# Altium PCB 4bit_decoder.PcbDoc
Units mm, origin at the board's own origin, x right, y up, seen from the top; angles counter-clockwise.
Board outline 158.85 x 44.7 mm, 2 copper layers (Top Layer, Bottom Layer); 30 components, 64 nets, 302 pads, 163 vias.
Unrouted connection lines stored in the file: 17.
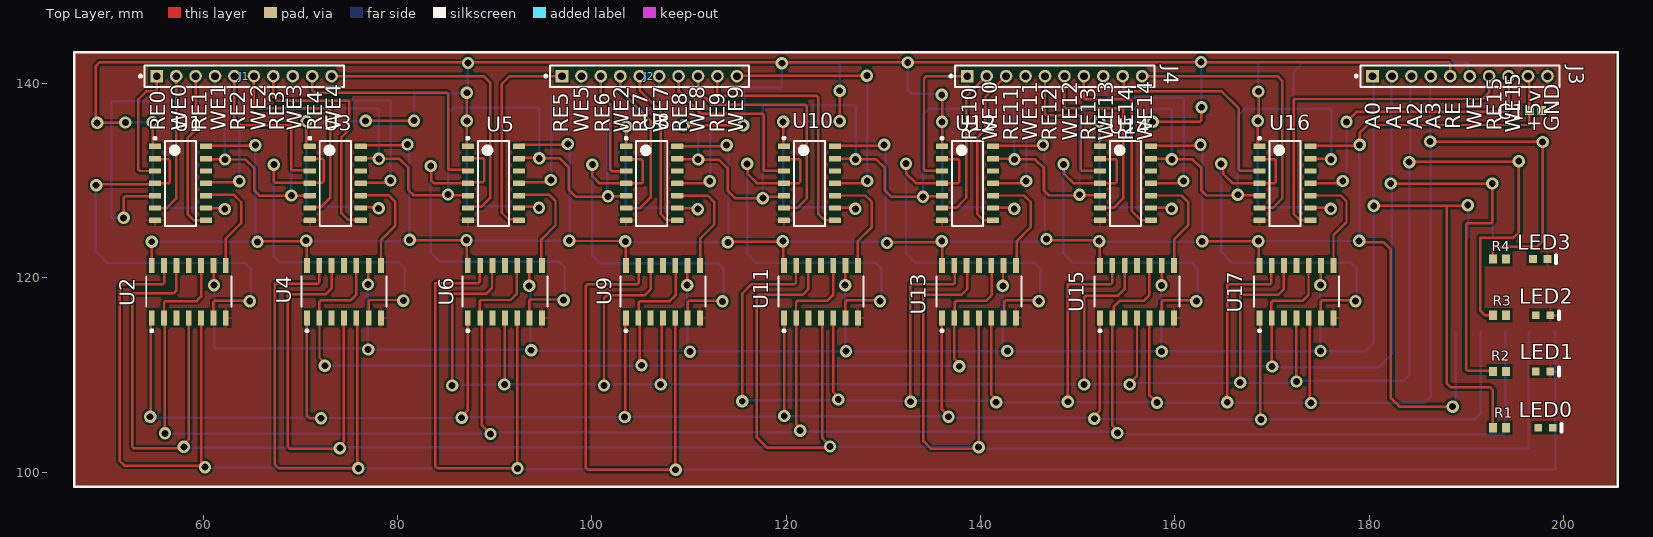
[diagram p0: Top Layer view]
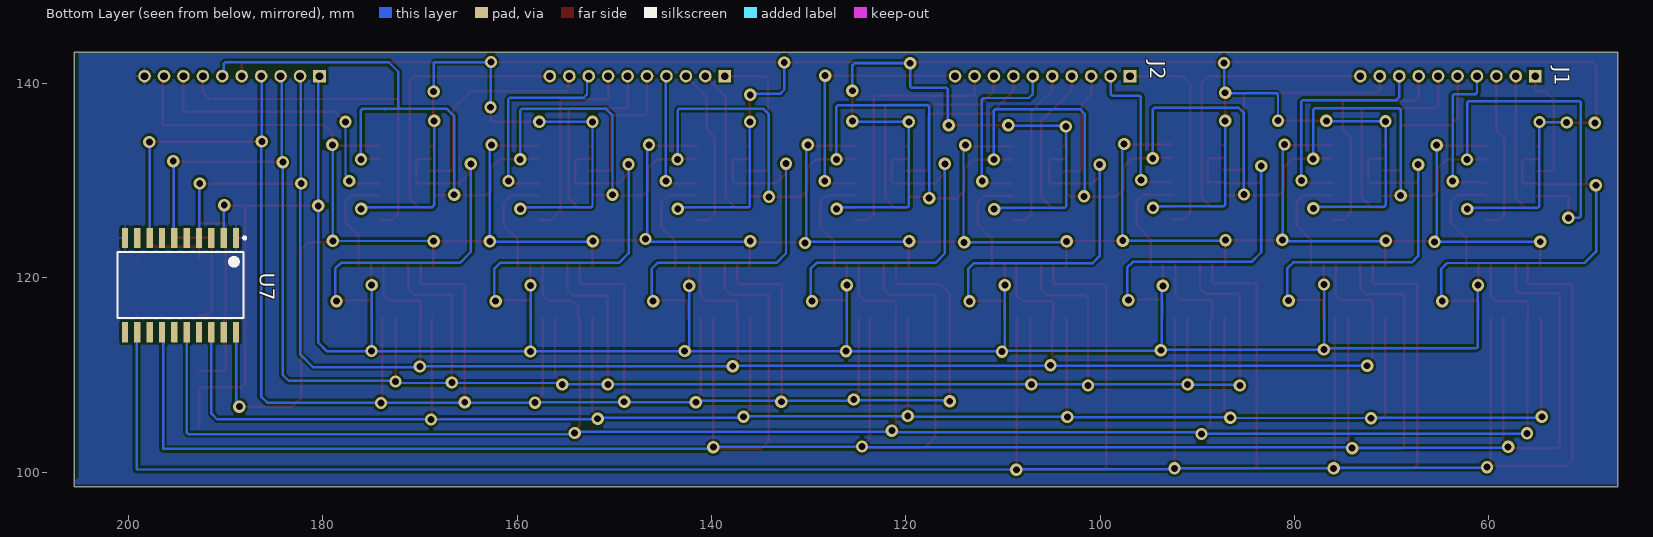
[diagram p1: Bottom Layer view, seen from below]
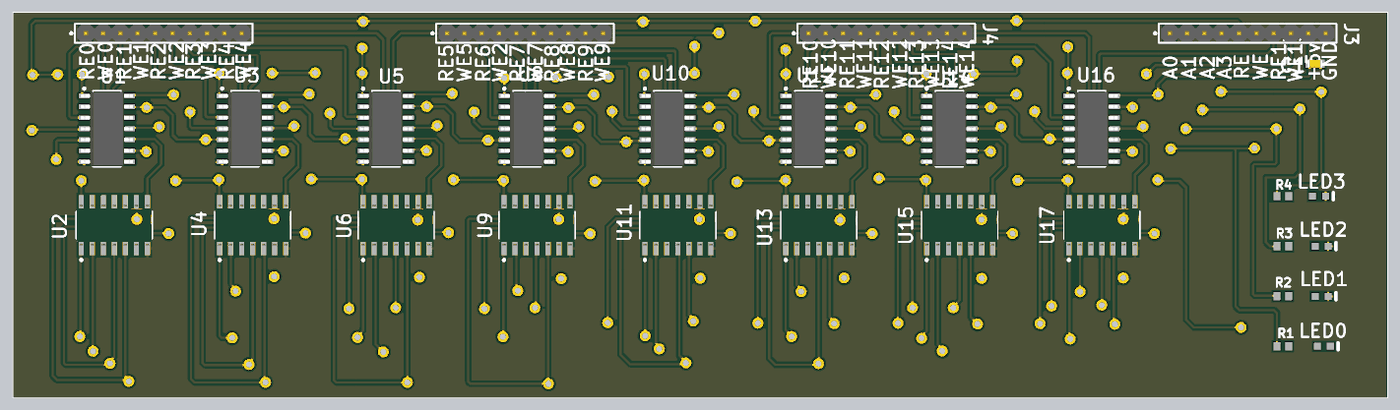
[diagram p2: 3D render of the assembled board from above, using the file's embedded part models]

## Layer stack, top to bottom
Top Solder: solder mask 0.0102, Solder Resist, Dk 3.5
Top Layer: signal copper 0.0356
Dielectric 1: dielectric 0.32, FR-4, Dk 4.8
Bottom Layer: signal copper 0.0356
Bottom Solder: solder mask 0.0102, Solder Resist, Dk 3.5

## Board outline
46.725,98.525 46.725,143.225 205.575,143.225 205.575,98.525

## Design rules (kind name [scope] priority, off if disabled: settings)
Clearance [All] p1: gap=0.254 ignorepadtopadclearanceinfootprint=FALSE
PolygonConnect [All] p1: connectstyle=Relief reliefconductorwidth=0.254 reliefentries=4 polygonreliefangle="90 Angle" airgapwidth=0.254
RoutingVias [All] p1: holewidth=0.711 width=1.27 viastyle="Through Hole" minholewidth=0.711 minwidth=1.27 maxholewidth=0.711 maxwidth=1.27
SolderMaskExpansion [All] p1: expansion=0.102 istentingtop=FALSE
SupplyNets "Schematic Supply Nets_1" [InNet('+5')] p1: voltage=0.000
SupplyNets "Schematic Supply Nets" [InNet('GND')] p2: voltage=0.000
Width [All] p1: maxlimit=0.254 minlimit=0.254 preferedwidth=0.254
30 further rules are at their usual default settings.

## Components (designator, comment, footprint, x,y, rotation, side; value= is the part's Value field where it differs from the comment)
C1 "Capacitor 100 nF +/-10% 50 V 0603" CAPC1608X90X40NL10T20 197.1,137.225 r180 top value=100nF
J1 "NRPN101PAEN-RC" FP-NRPN101PAEN-RC-MFG 64.225,140.75 r0 top
J2 "NRPN101PAEN-RC" FP-NRPN101PAEN-RC-MFG 105.925,140.75 r0 top
J3 "NRPN101PAEN-RC" FP-NRPN101PAEN-RC-MFG 189.325,140.75 r0 top
J4 "NRPN101PAEN-RC" FP-NRPN101PAEN-RC-MFG 147.625,140.75 r0 top
LED0 "19-217/R6C-AL1M2VY/3T" EVRL-0603-2_V 198.125,104.575 r0 top (schematic designator D1)
LED1 "19-217/R6C-AL1M2VY/3T" EVRL-0603-2_V 197.875,110.358 r0 top (schematic designator D2)
LED2 "19-217/R6C-AL1M2VY/3T" EVRL-0603-2_V 197.875,116.142 r0 top (schematic designator D3)
LED3 "19-217/R6C-AL1M2VY/3T" EVRL-0603-2_V 197.575,121.925 r0 top (schematic designator D4)
R1 "ERJ-3RQFR56V" RESC1608X55X30NL15T15 193.395,104.575 r0 top
R2 "ERJ-3RQFR56V" RESC1608X55X30NL15T15 193.395,110.358 r0 top
R3 "ERJ-3RQFR56V" RESC1608X55X30NL15T15 193.395,116.142 r0 top
R4 "ERJ-3RQFR56V" RESC1608X55X30NL15T15 193.395,121.925 r0 top
U1 "SN74HC7001DR" D0014A_L 57.675,129.72 r0 top
U2 "SN74HC21DR" FP-D0014A-MFG 58.525,118.575 r90 top
U3 "SN74HC7001DR" D0014A_L 73.601,129.72 r0 top
U4 "SN74HC21DR" FP-D0014A-MFG 74.495,118.575 r90 top
U5 "SN74HC7001DR" D0014A_L 89.863,129.72 r0 top
U6 "SN74HC21DR" FP-D0014A-MFG 91.048,118.575 r90 top
U7 "SN74ACT240DW" DW0020A_M 194.625,119.25 r270 bottom
U8 "SN74HC7001DR" D0014A_L 106.158,129.72 r0 top
U9 "SN74HC21DR" FP-D0014A-MFG 107.309,118.575 r90 top
U10 "SN74HC7001DR" D0014A_L 122.386,129.72 r0 top
U11 "SN74HC21DR" FP-D0014A-MFG 123.571,118.575 r90 top
U12 "SN74HC7001DR" D0014A_L 138.647,129.72 r0 top
U13 "SN74HC21DR" FP-D0014A-MFG 139.832,118.575 r90 top
U14 "SN74HC7001DR" D0014A_L 154.909,129.72 r0 top
U15 "SN74HC21DR" FP-D0014A-MFG 156.094,118.575 r90 top
U16 "SN74HC7001DR" D0014A_L 171.315,129.72 r0 top
U17 "SN74HC21DR" FP-D0014A-MFG 172.5,118.575 r90 top

## Footprints (in the part's own frame and the unit in brackets; to place one, negate y for a bottom-side part, rotate by r counter-clockwise, add the part's x,y. Pads: shape width x height; smd on the part's side, far side on the other; paste and mask are expansions set on the pad)
CAPC1608X90X40NL10T20 [mm] "Chip Capacitor, 2-Leads, Body 1.70x0.90mm, IPC Medium Density"
  rect 0.95x0.95 smd: 1(-0.625,0) 2(0.625,0)
  body extent -0.85,-0.45 0.85,0.45, height 0.9
D0014A_L [mm] "SOIC, 14-Leads, Body 8.75x4mm, Pitch 1.27mm, IPC High Density"
  rrect18% 1.25x0.55 smd: 1(-2.625,3.81) 2(-2.625,2.54) 3(-2.625,1.27) 4(-2.625,0) 5(-2.625,-1.27) 6(-2.625,-2.54) 7(-2.625,-3.81) 8(2.625,-3.81) 9(2.625,-2.54) 10(2.625,-1.27) 11(2.625,0) 12(2.625,1.27) 13(2.625,2.54) 14(2.625,3.81)
  silkscreen extent -2.75,-4.38 1.6,4.76, body extent -3.02,-4.32 3.02,4.32, height 1.59
DW0020A_M [mm] "SOIC, 20-Leads, Body 13x7.6mm, Pitch 1.27mm, IPC Low Density"
  rrect15% 2.1x0.65 smd: 1(-4.85,5.715) 2(-4.85,4.445) 3(-4.85,3.175) 4(-4.85,1.905) 5(-4.85,0.635) 6(-4.85,-0.635) 7(-4.85,-1.905) 8(-4.85,-3.175) 9(-4.85,-4.445) 10(-4.85,-5.715) 11(4.85,-5.715) 12(4.85,-4.445) 13(4.85,-3.175) 14(4.85,-1.905) 15(4.85,-0.635) 16(4.85,0.635) 17(4.85,1.905) 18(4.85,3.175) 19(4.85,4.445) 20(4.85,5.715)
  silkscreen extent -4.97,-6.5 3.4,6.71, body extent -5.16,-6.4 5.16,6.4, height 2.52
EVRL-0603-2_V [mm] "SMD, 2-Leads, Body 1.6x0.8mm"
  rect 0.8x0.8 smd: 1(-0.75,0) 2(0.75,0)
  silkscreen extent 1.65,-0.4 1.65,0.4, body extent -0.8,-0.4 0.8,0.4, height 0.5
FP-D0014A-MFG [mm]
  rect 1.55x0.6 smd paste-1000 mask+0: 1(-2.7,3.81) 2(-2.7,2.54) 3(-2.7,1.27) 4(-2.7,0) 5(-2.7,-1.27) 6(-2.7,-2.54) 7(-2.7,-3.81) 8(2.7,-3.81) 9(2.7,-2.54) 10(2.7,-1.27) 11(2.7,0) 12(2.7,1.27) 13(2.7,2.54) 14(2.7,3.81)
  silkscreen extent -4.15,-4.37 1.55,4.37, body extent -3.57,-4.62 3.57,4.62, height 0.25
FP-NRPN101PAEN-RC-MFG [mm]
  rect 1.3x1.3 hole 0.8 paste-2539.97 mask+0: 1(-9,0)
  round 1.3 hole 0.8 paste-2539.97 mask+0: 2(-7,0) 3(-5,0) 4(-3,0) 5(-1,0) 6(1,0) 7(3,0) 8(5,0) 9(7,0) 10(9,0)
  silkscreen extent -10.8,-1.1 10.25,1.1, body extent -9.99,-1 10.01,1, height 5.95
RESC1608X55X30NL15T15 [mm] "Chip Resistor, 2-Leads, Body 1.60x0.80mm, IPC Medium Density"
  rect 0.8x0.95 smd: 1(-0.675,0) 2(0.675,0)
  body extent -0.87,-0.48 0.87,0.48, height 0.55

## Part data
C1: library part CMP-001-00017-6, "Chip Capacitor, 100 nF, +/- 10%, 50 V, 0603 (1608 Metric)", Capacitor Type=Ceramic, Case/Package=0603, Max Operating Temperature=125°C, Min Operating Temperature=-55°C, Tolerance=10%, Voltage Rating=50V, Mounting Technology=SM, Pins=2, RoHS Compliant=True
J1 J2 J3 J4: library part CMP-25680-000006-1, "CONN HEADER VERT 10POS 2MM", Current Rating=2A, Manufacturer=Sullins, Package=0, Temperature="-40°C to +105°C", Temperature Range High=+105°C, Temperature Range Low=-40°C, Voltage Rating=150V, Automotive=No, Category=Conn, ComponentLink2Description=Datasheet, ComponentLink2URL=https://s3.amazonaws.com/catalogspreads-pdf/PAGE104-105%202mm%20MALE%20HDR%20ST%20RA%20SMT.pdf, Conn Gender=Male, Conn Orientation=Straight, Contact Material=Gold,Nickel, Device Class L1=Connectors, Device Class L2="Headers and Wire Housings", Device Class L3=unset, Digikey Description="CONN HEADER VERT 10POS 2MM", Footprint Url=https://drawings-pdf.s3.amazonaws.com/10531.pdf, Height=5.95mm, Lead Free=Yes, Manufacturer Part Number=NRPN101PAEN-RC, Number Of Contacts=10, Number Of Rows=1, Octopart=https://octopart.com/nrpn101paen-rc-sullins-18674398, Pitch=2mm, RoHS=TRUE
LED0 LED1 LED2 LED3: library part CMP-007-00004-2, "Chip LED, Red, 5 V, 25 mA, -40 to 85 degC, 2-Pin SMD (0603), RoHS, Tape and Reel", Case/Package=0603, Colour=Red, Forward Voltage=2.2V, Manufacturer="Everlight Electronics", Package Description="2-Pin Surface Mount Device, Body 1.6 x 0.8 mm", Datasheet URL=https://datasheet.ciiva.com/4688/el-19-217-r6c-al1m2vy-3tpdf-187026-4688713.pdf, Datasheet Version="Rev. 1, 01/2005", Lens Style=Clear, Manufacturer URL=http://www.everlight.com/, Mounting Technology=SM, Package Reference=0603, RoHS Compliant=False
R1 R2 R3 R4: library part CMP-2000-00858-1, Manufacturer=Panasonic, Part Number=ERJ-3RQFR56V
U1 U3 U5 U8 U10 U12 U14 U16: library part CMP-016-00014-1, "4-ch, 4-input 2-V to 6-V 5.2-mA drive strength AND gate with Schmitt-Trigger inputs 14-SOIC -40 to 85"
U2 U4 U6 U9 U11 U13 U15 U17: library part CMP-016-00017-1, "2-ch, 4-input, 2-V to 6-V 5.2 mA drive strength AND gate 14-SOIC -40 to 85"
U7: library part CMP-016-00012-1, "Buffer/Line Driver 8-Channel Inverting 3-Straight CMOS 20-Pin SOIC"

## Via types
v1: diameter 1.27, hole 0.711, Top Layer to Bottom Layer, 163 vias

## Nets (pads, with @x,y where several pads share a name; then routed paths per layer and width w, separated by ;. In a path a pad name is that pad's centre, name@x,y a point inside that pad or via, vN(x,y) a via of type N, cw(c..) or ccw(c..) an arc to the next point about the centre after c; other vN are vias at no path point)
+5: C1.2 J3.9 U1.14 U2.14 U3.14 U4.14 U5.14 U6.14 U7.20 U8.14 U9.14 U10.14 U11.14 U12.14 U13.14 U14.14 U15.14 U16.14 U17.14 | length 321.5
  Top Layer w0.254: U2.14 v1(54.715,123.71) ; U1.14 60.36,133.59 65.315,133.59 v1(65.375,133.65) ; v1(65.6,123.7) 65.663,123.762 70.537,123.762 v1(70.6,123.825) 70.643,123.783 70.643,121.317 U4.14 ; U3.14@76.134,133.598 76.163,133.627 80.927,133.627 v1(81.025,133.725) ; v1(81.25,123.9) 81.263,123.887 87.088,123.887 v1(87.1,123.875) 87.143,123.833 87.143,121.367 U6.14@87.185,121.325 ; U5.14@92.634,133.648 92.663,133.677 97.427,133.677 v1(97.525,133.775) ; v1(97.675,123.825) 97.712,123.787 103.413,123.787 v1(103.45,123.75) 103.493,123.707 103.493,121.242 U9.14@103.535,121.2 ; U8.14@108.984,133.523 109.013,133.552 113.777,133.552 v1(113.875,133.65) ; v1(114,123.65) 114.062,123.712 119.587,123.712 v1(119.65,123.775) 119.692,123.733 119.692,121.267 U11.14@119.735,121.225 ; U10.14@125.184,133.548 125.213,133.577 129.977,133.577 v1(130.075,133.675) ; v1(130.375,123.575) 130.475,123.675 135.9,123.675 v1(136,123.775) 136.042,123.733 136.042,121.267 U13.14@136.085,121.225 ; U12.14@141.534,133.548 141.563,133.577 146.327,133.577 v1(146.425,133.675) ; v1(146.775,124) 146.888,123.887 152.088,123.887 v1(152.2,123.775) 152.242,123.733 152.242,121.267 U15.14@152.285,121.225 ; U14.14@157.734,133.548 157.763,133.577 162.527,133.577 v1(162.625,133.675) ; v1(162.8,123.75) 162.812,123.762 168.562,123.762 v1(168.575,123.775) 168.617,123.733 168.617,121.267 U17.14@168.66,121.225 ; U16.14@174.109,133.548 174.138,133.577 178.9,133.577 v1@178.998,133.675 ; v1(178.95,123.8) 179.075,123.675 181.475,123.675 182.225,122.925 182.225,107.625 183.1,106.75 v1(188.575,106.75) ; v1(179,133.675) 179,134.9 179.825,135.725 196.326,135.725 196.475,135.874 196.475,140.6 J3.9
  Bottom Layer w0.254: v1(54.715,123.71) 65.226,123.71 65.375,123.859 v1(65.375,133.65) ; v1(70.6,123.825) 70.675,123.75 81.032,123.75 81.209,123.927 81.209,133.541 v1(81.025,133.725) ; v1(87.1,123.875) 87.175,123.8 97.532,123.8 97.709,123.977 97.709,133.591 v1(97.525,133.775) ; v1(103.45,123.75) 103.525,123.675 113.882,123.675 114.059,123.852 114.059,133.466 v1(113.875,133.65) ; v1(119.65,123.775) 119.725,123.7 130.082,123.7 130.259,123.877 130.259,133.491 v1(130.075,133.675) ; v1(136,123.775) 136.075,123.7 146.432,123.7 146.609,123.877 146.609,133.491 v1(146.425,133.675) ; v1(152.2,123.775) 152.275,123.7 162.632,123.7 162.809,123.877 162.809,133.491 v1(162.625,133.675) ; v1(168.575,123.775) 168.587,123.787 178.938,123.787 v1(178.95,123.8) 178.975,123.825 178.975,133.65 v1@179,133.675 ; v1(188.575,106.75) 188.575,107.025 188.911,107.361 188.911,114.399 U7.20
A0: J3.1 R1.1 U2.9 U4.9 U6.9 U7.2 U9.9 U11.9 U13.9 U15.9 U17.9 | length 255.8
  Top Layer w0.254: U2.9 61.095,121.245 61.095,119.28 v1(61.125,119.25) ; v1(76.959,119.318) 76.997,119.356 76.997,121.237 U4.9 ; v1(93.55,119.175) 93.569,119.194 93.569,121.256 U6.9 ; v1(109.809,119.243) 109.829,119.263 109.829,121.255 U9.9 ; v1@126.079,119.263 U11.9@126.079,121.255 ; v1@142.304,119.188 U13.9@142.304,121.18 ; v1@158.629,119.238 U15.9@158.629,121.23 ; v1(174.959,119.268) 175,119.309 175,121.235 U17.9 ; v1(180.45,127.4) 180.488,127.437 187.825,127.437 ; v1(190.125,127.475) 190.087,127.437 187.825,127.437 ; R1.1 192.72,108.43 192.4,108.75 188.35,108.75 187.95,109.15 187.95,127.312 187.825,127.437
  Bottom Layer w0.254: v1(61.125,119.25) 61.125,112.899 61.274,112.75 v1@76.85,112.75 ; v1@76.781,112.819 v1@76.85,112.75 ; v1@76.959,112.703 v1(76.959,119.318) ; v1(93.55,119.175) 93.65,119.075 93.65,112.65 v1@93.712,112.587 ; v1(109.809,119.243) 109.809,112.966 110.1,112.675 v1(110.1,112.4) ; v1@126.059,112.966 v1(126.059,119.243) ; 142.284,112.956 v1(142.284,119.168) ; v1@158.609,112.941 v1(158.609,119.218) ; v1@174.959,112.991 v1(174.959,119.268) ; J3.1 180.45,140.625 v1(180.45,127.4) 180.45,113.325 179.55,112.425 v1(158.625,112.425) 158.6,112.45 142.775,112.45 v1(142.75,112.475) 142.737,112.463 126.162,112.463 126.125,112.425 110.125,112.425 v1(110.1,112.4) ; v1(190.125,127.475) 190.153,127.447 190.153,124.127 U7.2 ; v1@76.85,112.75 v1(76.975,112.625) 77.013,112.587 v1@93.712,112.587 ; v1@93.712,112.587 v1@93.725,112.575 ; v1@93.725,112.575 v1(93.75,112.55) ; v1@93.725,112.575 v1(93.75,112.55) ; v1(93.75,112.55) 93.825,112.475 110.025,112.475 v1(110.1,112.4)
  other v1: 126.15,112.45 174.975,112.475
A1: J3.2 R2.1 U4.2 U4.10 U7.4 U9.2 U9.10 U13.2 U13.10 U17.2 U17.10 | length 235.1
  Top Layer w0.254: v1(72.525,110.95) 72.525,111.225 71.978,111.772 71.978,115.853 U4.2 71.955,117.519 72.104,117.668 75.159,117.668 75.765,118.274 U4.10 ; U9.2 104.935,115.71 104.935,111.165 v1(105.1,111) ; U9.2@104.805,115.875 104.805,117.444 104.954,117.593 108.009,117.593 108.615,118.199 U9.10@108.615,121.2 ; v1(137.8,110.9) 137.8,111.175 137.292,111.683 137.292,115.762 137.355,115.825 137.355,117.469 137.504,117.618 140.559,117.618 141.165,118.224 U13.10@141.165,121.225 ; v1(170,110.875) 169.98,110.895 169.98,115.775 169.93,115.825 169.93,117.469 170.079,117.618 173.134,117.618 173.74,118.224 U17.10@173.74,121.225 ; v1(182.2,129.7) v1(192.65,129.7) 192.65,125.774 192.501,125.625 190.099,125.625 189.95,125.476 189.95,110.582 190.099,110.433 192.645,110.433 R2.1
  Bottom Layer w0.254: v1(72.525,110.95) 72.55,110.975 105.075,110.975 v1(105.1,111) 105.15,110.95 137.75,110.95 137.812,110.888 169.987,110.888 170.075,110.8 180.975,110.8 182.325,112.15 182.325,129.575 v1(182.2,129.7) 182.262,129.762 182.262,140.687 J3.2 ; v1(192.65,129.7) 192.685,129.665 192.685,124.135 U7.4
A2: J3.3 R3.1 U6.4 U6.12 U7.6 U9.4 U9.12 U15.4 U15.12 U17.4 U17.12 | length 261.7
  Top Layer w0.254: v1(85.625,108.925) 85.625,118.125 85.843,118.343 89.109,118.343 89.725,118.959 U6.12@89.725,121.325 ; v1(91,109.025) 91.024,109.049 91.024,115.851 U6.4 ; v1(101.25,108.925) 101.25,117.909 101.559,118.218 105.459,118.218 106.075,118.834 U9.12@106.075,121.2 ; v1(107.075,109.025) 107.192,109.142 107.192,115.758 U9.4 ; v1(150.65,109.025) 150.65,118.026 150.799,118.175 154.141,118.175 154.825,118.859 U15.12@154.825,121.225 ; v1(155.35,109.025) 155.35,109.154 156.094,109.898 U15.4 ; v1(166.7,109.225) 166.7,118.227 166.684,118.243 170.584,118.243 171.2,118.859 U17.12@171.2,121.225 ; v1(172.5,109.325) U17.4 ; v1(184.1,131.9) 184.15,131.95 195.325,131.95 v1(195.375,132) 195.375,124.675 194.8,124.1 191.425,124.1 191.425,116.6 191.883,116.142 R3.1
  Bottom Layer w0.254: v1(85.625,108.925) 85.675,108.975 90.95,108.975 v1(91,109.025) v1(107.075,109.025) v1(150.65,109.025) v1(155.35,109.025) 155.5,109.175 172.35,109.175 v1(172.5,109.325) 172.588,109.413 183.513,109.413 184.1,110 v1(184.1,131.9) 184.212,132.012 184.212,140.637 J3.3 ; U7.6 195.318,124.157 195.318,131.943 v1(195.375,132)
A3: J3.4 R4.1 U7.8 U11.5 U11.13 U13.5 U13.13 U15.5 U15.13 U17.5 U17.13 | length 252.1
  Top Layer w0.254: v1(115.475,107.3) 115.475,118.384 116.434,119.343 120.856,119.343 121.005,119.492 U11.13@121.005,121.225 ; U11.5 124.841,108.259 125.35,107.75 v1(125.35,107.475) ; v1@132.784,107.266 132.784,119.343 137.206,119.343 137.355,119.492 U13.13@137.355,121.225 ; U13.5 141.102,107.973 141.6,107.475 v1(141.6,107.2) ; v1@148.959,107.266 148.959,119.343 ; 148.984,119.343 153.406,119.343 153.555,119.492 U15.13@153.555,121.225 ; U15.5 157.364,107.936 v1(158.15,107.15) ; v1@165.359,107.216 165.359,119.293 ; 165.359,119.343 169.781,119.343 169.93,119.492 U17.13@169.93,121.225 ; U17.5 173.885,115.76 173.885,107.24 v1(174,107.125) ; v1(186.25,134.025) 186.275,134 197.8,134 v1(197.825,133.975) 197.825,123.8 197.2,123.175 192.869,123.175 192.72,123.026 R4.1
  Bottom Layer w0.254: v1(115.475,107.3) 115.562,107.387 125.263,107.387 v1(125.35,107.475) 125.488,107.337 141.463,107.337 v1(141.6,107.2) 141.7,107.1 141.775,107.175 158.125,107.175 v1(158.15,107.15) 185.7,107.15 186.325,107.775 186.325,133.95 v1(186.25,134.025) 186.287,134.062 186.287,140.712 J3.4 ; U7.8 197.813,124.112 197.813,133.963 v1(197.825,133.975)
  other v1: 165.38,107.195 132.805,107.245 148.98,107.245
GND: C1.1 J3.10 LED0.2 LED1.2 LED2.2 LED3.2 U1.7 U2.7 U3.7 U4.7 U5.7 U6.7 U7.1 U7.10 U7.19 U8.7 U9.7 U10.7 U11.7 U12.7 U13.7 U14.7 U15.7 U16.7 U17.7
NetD1_1: LED0.1 R1.2 | length 0
  Top Layer w0.254: 199.102,104.575 199.125,104.552
NetD2_1: LED1.1 R2.2 | length 0
  Top Layer w0.254: 199.102,110.358 199.125,110.335
NetD3_1: LED2.1 R3.2 | length 0
  Top Layer w0.254: 199.102,116.142 199.125,116.118
NetD4_1: LED3.1 R4.2 | length 0
  Top Layer w0.254: 199.102,121.925 199.125,121.902
NetU1_2: U1.2 U1.4 U2.6 | length 43.8
  Top Layer w0.254: v1(49,129.525) 49.097,129.622 54.952,129.622 U1.4 56.426,129.72 56.575,129.869 56.575,132.045 56.426,132.194 55.116,132.194 U1.2 ; U2.6 61.065,117.501 61.214,117.65 64.75,117.65 v1(64.8,117.6)
  Bottom Layer w0.254: v1(49,129.525) 48.975,129.5 48.975,122.7 50.15,121.525 64.3,121.525 64.9,120.925 64.9,117.7 v1(64.8,117.6)
NetU1_10: U1.10 U1.12 U2.8 | length 11.1
  Top Layer w0.254: U1.10 60.375,128.525 63.175,128.525 63.925,127.775 63.925,125.625 62.335,124.035 U2.8
NetU3_2: U3.2 U3.4 U4.6 | length 42.9
  Top Layer w0.254: v1(67.275,131.65) 67.275,129.937 67.424,129.788 72.26,129.788 72.409,129.937 72.409,132.113 72.26,132.262 70.95,132.262 U3.2@70.884,132.328 ; U4.6 77.035,117.569 77.184,117.718 80.532,117.718 v1(80.6,117.65)
  Bottom Layer w0.254: v1(67.275,131.65) 67.275,122.226 67.908,121.593 80.134,121.593 80.734,120.993 80.734,117.784 v1(80.6,117.65)
NetU3_10: U3.10 U3.12 U4.8 | length 11.1
  Top Layer w0.254: U3.10@76.134,128.518 79.084,128.518 79.759,127.843 79.759,125.334 78.305,123.88 U4.8
NetU5_2: U5.2 U5.4 U6.6 | length 43.1
  Top Layer w0.254: v1(83.425,131.5) 83.491,131.434 83.491,129.984 83.755,129.72 87.12,129.72 87.238,129.838 88.76,129.838 88.909,129.987 88.909,132.163 88.76,132.312 87.45,132.312 U5.2@87.384,132.378 ; U6.6@93.535,115.925 93.535,117.619 93.684,117.768 97.032,117.768 v1(97.1,117.7)
  Bottom Layer w0.254: v1(83.425,131.5) 83.425,122.626 84.408,121.643 96.634,121.643 97.234,121.043 97.234,117.834 v1(97.1,117.7)
NetU5_10: U5.10 U5.12 U6.8 | length 11.1
  Top Layer w0.254: U5.10@92.634,128.568 95.584,128.568 96.259,127.893 96.259,125.409 94.805,123.955 U6.8@94.805,121.325
NetU8_2: U8.2 U8.4 U9.6 | length 42.8
  Top Layer w0.254: v1(100.05,131.65) 100.05,130.452 100.789,129.713 103.533,129.713 105.101,129.713 105.25,129.862 105.25,132.038 105.101,132.187 103.8,132.187 U8.2@103.734,132.253 ; U9.6@109.885,115.8 109.885,117.494 110.034,117.643 113.382,117.643 v1(113.45,117.575)
  Bottom Layer w0.254: v1(100.05,131.65) 100.05,122.226 100.758,121.518 112.984,121.518 113.584,120.918 113.584,117.709 v1(113.45,117.575)
NetU8_10: U8.10 U8.12 U9.8 | length 11.1
  Top Layer w0.254: U8.10@108.984,128.443 111.934,128.443 112.609,127.768 112.609,125.509 111.155,124.055 U9.8@111.155,121.2
NetU10_2: U10.2 U10.4 U11.6 | length 43.1
  Top Layer w0.254: v1(115.975,131.725) 116.018,131.682 116.018,130.709 116.989,129.738 119.761,129.738 121.31,129.738 121.459,129.887 121.459,132.063 121.31,132.212 120,132.212 U10.2@119.934,132.278 ; U11.6@126.085,115.825 126.085,117.519 126.234,117.668 129.582,117.668 v1(129.65,117.6)
  Bottom Layer w0.254: v1(115.975,131.725) 115.975,122.526 116.958,121.543 129.184,121.543 129.784,120.943 129.784,117.734 v1(129.65,117.6)
NetU10_10: U10.10 U10.12 U11.8 | length 11.1
  Top Layer w0.254: U10.10@125.184,128.468 128.134,128.468 128.809,127.793 128.809,125.234 127.355,123.78 U11.8@127.355,121.225
NetU12_2: U12.2 U12.4 U13.6 | length 43.2
  Top Layer w0.254: v1(132.325,131.75) 132.343,131.732 132.343,130.734 133.339,129.738 136.022,129.738 137.66,129.738 137.809,129.887 137.809,132.063 137.66,132.212 136.35,132.212 U12.2@136.284,132.278 ; U13.6@142.435,115.825 142.435,117.519 142.584,117.668 145.932,117.668 v1(146,117.6)
  Bottom Layer w0.254: v1(132.325,131.75) 132.325,122.526 133.308,121.543 145.534,121.543 146.134,120.943 146.134,117.734 v1(146,117.6)
NetU12_10: U12.10 U12.12 U13.8 | length 11.1
  Top Layer w0.254: U12.10@141.534,128.468 144.484,128.468 145.159,127.793 145.159,125.209 143.705,123.755 U13.8@143.705,121.225
NetU14_2: U14.2 U14.4 U15.6 | length 43
  Top Layer w0.254: v1(148.525,131.675) 148.618,131.582 148.618,130.659 149.539,129.738 152.284,129.738 153.86,129.738 154.009,129.887 154.009,132.063 153.86,132.212 152.55,132.212 U14.2@152.484,132.278 ; U15.6@158.635,115.825 158.635,117.519 158.784,117.668 162.132,117.668 v1(162.2,117.6)
  Bottom Layer w0.254: v1(148.525,131.675) 148.525,122.526 149.508,121.543 161.734,121.543 162.334,120.943 162.334,117.734 v1(162.2,117.6)
NetU14_10: U14.10 U14.12 U15.8 | length 11.1
  Top Layer w0.254: U14.10@157.734,128.468 160.684,128.468 161.359,127.793 161.359,125.384 159.905,123.93 U15.8@159.905,121.225
NetU16_2: U16.2 U16.4 U17.6 | length 43.3
  Top Layer w0.254: v1(164.75,131.725) 164.943,131.532 164.943,130.709 165.914,129.738 168.69,129.738 170.235,129.738 170.384,129.887 170.384,132.063 170.235,132.212 168.925,132.212 U16.2@168.859,132.278 ; U17.6@175.01,115.825 175.01,117.519 175.159,117.668 178.507,117.668 v1(178.575,117.6)
  Bottom Layer w0.254: v1(164.75,131.725) 164.75,122.676 165.883,121.543 178.109,121.543 178.709,120.943 178.709,117.734 v1(178.575,117.6)
NetU16_10: U16.10 U16.12 U17.8 | length 10.9
  Top Layer w0.254: U16.10@174.109,128.468 177.059,128.468 177.65,127.877 177.65,125.725 176.31,124.385 U17.8
Not_A0: U2.1 U4.1 U6.1 U7.18 U9.1 U11.1 U13.1 U15.1 U17.1 | length 230.2
  Top Layer w0.254: v1(54.55,105.7) 54.633,105.783 54.633,115.793 U2.1 ; U4.1 70.685,105.824 70.959,105.55 v1(72.125,105.55) ; v1(86.6,105.6) 86.6,105.761 87.238,106.399 U6.1 ; v1(103.375,105.675) 103.437,105.737 103.437,115.813 U9.1 ; U11.1 119.78,115.855 119.78,105.795 v1(119.8,105.775) ; U13.1 136.022,106.459 136.7,105.781 v1(136.7,105.7) ; v1(151.7,105.5) 151.7,105.77 152.284,106.353 U15.1 ; U17.1 168.77,115.795 168.77,105.505 v1(168.85,105.425)
  Bottom Layer w0.254: v1(54.55,105.7) 54.625,105.625 72.05,105.625 v1(72.125,105.55) 72.15,105.525 72.2,105.575 86.575,105.575 v1(86.6,105.6) 86.638,105.638 103.238,105.638 103.275,105.6 103.4,105.725 119.75,105.725 v1(119.8,105.775) 119.837,105.737 136.388,105.737 136.425,105.7 v1(136.7,105.7) 136.8,105.6 151.6,105.6 v1(151.7,105.5) 151.737,105.463 168.812,105.463 v1(168.85,105.425) 190.842,105.425 191.45,106.033 U7.18
Not_A1: U2.2 U2.10 U6.2 U6.10 U7.16 U11.2 U11.10 U15.2 U15.10 | length 231.5
  Top Layer w0.254: v1(56.075,104) 56.03,104.045 56.03,115.83 U2.2 55.975,115.885 55.975,117.451 56.124,117.6 59.325,117.6 59.795,118.07 U2.10 ; U6.2@88.455,115.925 88.455,117.569 88.604,117.718 91.659,117.718 92.265,118.324 U6.10@92.265,121.325 ; U6.2 88.681,115.702 88.681,104.819 v1(89.575,103.925) ; U11.2 U11.2@121.031,115.799 ; v1(121.425,104.275) 121.425,104.537 121.031,104.932 U11.2@121.031,115.799 ; U11.10@124.815,121.225 124.815,118.224 124.209,117.618 121.154,117.618 121.005,117.469 121.005,115.825 U11.2@121.031,115.799 ; U15.2 153.554,104.821 154.075,104.3 v1(154.075,104.025) ; U15.2@153.555,115.875 153.715,116.035 153.715,117.031 154.302,117.618 156.759,117.618 157.365,118.224 U15.10@157.365,121.225
  Bottom Layer w0.254: v1(56.075,104) 56.113,103.963 89.537,103.963 v1(89.575,103.925) 89.75,104.1 121.25,104.1 v1(121.425,104.275) 121.55,104.15 153.95,104.15 v1(154.075,104.025) 154.175,103.925 193.825,103.925 193.99,104.09 U7.16
Not_A2: U2.4 U2.12 U4.4 U4.12 U7.14 U11.4 U11.12 U13.4 U13.12 | length 320.1
  Top Layer w0.254: U2.12 57.255,118.705 56.95,118.4 52.874,118.4 52.725,118.251 52.725,102.599 52.874,102.45 57.875,102.45 v1(58.025,102.6) 58.025,102.875 58.525,103.375 U2.4 ; U4.12 73.225,118.909 72.609,118.293 68.709,118.293 68.709,102.649 68.958,102.4 74,102.4 v1(74.075,102.475) 74.075,102.712 74.495,103.132 U4.4 ; U11.12@122.275,121.225 122.275,118.859 121.659,118.243 117.099,118.243 116.95,118.094 116.95,103.633 118.083,102.5 124.35,102.5 v1(124.5,102.65) 124.5,102.716 123.725,103.491 123.725,115.721 U11.4 ; U13.12@138.625,121.225 138.625,118.859 138.009,118.243 134.109,118.243 134.109,103.191 134.875,102.425 139.65,102.425 v1(139.8,102.575) 139.816,102.591 139.816,115.859 U13.4
  Bottom Layer w0.254: v1(58.025,102.6) 58.087,102.538 73.987,102.538 74.062,102.462 v1(74.075,102.475) 74.163,102.562 124.412,102.562 v1(124.5,102.65) 124.538,102.612 139.762,102.612 v1(139.8,102.575) 139.975,102.4 196.425,102.4 196.425,114.295 U7.14
Not_A3: U2.5 U2.13 U4.5 U4.13 U6.5 U6.13 U7.12 U9.5 U9.13 | length 351.5
  Top Layer w0.254: U2.13 55.985,119.474 55.836,119.325 51.55,119.325 51.401,119.176 51.401,101.174 51.9,100.675 v1@59.785,100.675 ; U2.5 59.785,115.865 v1@59.785,100.675 ; v1(60.2,100.525) 60.05,100.675 v1@59.785,100.675 ; U4.13 71.955,119.542 71.806,119.393 67.384,119.393 67.384,100.799 67.783,100.4 v1(75.975,100.4) 75.87,100.505 75.87,115.77 U4.5 ; U6.13@88.455,121.325 88.455,119.592 88.306,119.443 83.884,119.443 83.884,100.641 84.125,100.4 v1(92.35,100.4) 92.334,100.416 92.334,115.859 U6.5 ; U9.13@104.805,121.2 104.805,119.467 104.656,119.318 99.524,119.318 99.375,119.169 99.375,100.475 99.6,100.25 v1(108.625,100.25) 108.602,100.273 108.602,115.852 U9.5
  Bottom Layer w0.254: v1(60.2,100.525) 60.262,100.463 75.912,100.463 v1(75.975,100.4) v1(92.35,100.4) 92.425,100.325 108.55,100.325 v1(108.625,100.25) 108.65,100.275 199.15,100.275 199.15,114.32 U7.12
RE: J3.5 U1.1 U1.9 U3.1 U3.9 U5.1 U5.9 U8.1 U8.9 U10.1 U10.9 U12.1 U12.9 U14.1 U14.9 U16.1 U16.9 | length 417.6
  Top Layer w0.254: v1@48.975,135.95 48.975,141.8 49.35,142.175 188.125,142.175 188.325,141.975 J3.5 ; v1(49.1,135.95) 49.113,135.962 51.987,135.962 v1(52,135.975) ; v1(54.8,136.025) 54.8,133.678 54.948,133.53 U1.1 ; U1.9 61.807,127.18 v1@61.827,127.2 ; v1(70.634,136.093) 70.634,133.746 70.782,133.598 U3.1@70.884,133.598 ; U3.9@76.134,127.248 77.641,127.248 v1@77.661,127.268 ; v1(76.725,136.15) 81.675,136.15 v1(81.7,136.175) ; v1@87.1,139.075 v1(87.134,139.041) v1(87.134,136.143) 87.134,133.796 87.282,133.648 U5.1@87.384,133.648 ; U5.9@92.634,127.298 94.141,127.298 v1@94.161,127.318 ; v1(103.525,135.575) 103.525,133.678 103.68,133.523 U8.1@103.734,133.523 ; U8.9@108.984,127.173 110.491,127.173 v1@110.511,127.193 ; v1(109.45,135.7) v1(115.575,135.7) ; v1(119.684,136.043) 119.684,133.696 119.832,133.548 U10.1@119.934,133.548 ; U10.9@125.184,127.198 126.691,127.198 v1@126.711,127.218 ; v1(125.5,136.125) v1(125.5,139.25) ; v1@136.025,138.6 136.034,138.591 v1(136.034,136.043) 136.034,133.696 136.182,133.548 U12.1@136.284,133.548 ; U12.9@141.534,127.198 143.041,127.198 v1@143.061,127.218 ; v1(152.234,136.043) 152.234,133.696 152.382,133.548 U14.1@152.484,133.548 ; v1(157.707,136.043) 162.543,136.043 162.725,136.225 v1(162.725,137.55) ; U14.9@157.734,127.198 159.241,127.198 v1@159.261,127.218 ; v1(168.575,139.175) 168.615,139.135 168.615,136.24 v1(168.525,136.15) 168.525,133.678 168.655,133.548 U16.1@168.859,133.548 ; U16.9@174.109,127.198 175.616,127.198 v1@175.636,127.218
  Bottom Layer w0.254: v1@52.225,136.025 v1(54.8,136.025) 54.8,127.374 54.949,127.225 62.075,127.225 v1(62.225,127.075) ; v1(76.725,136.15) 76.668,136.093 v1(70.634,136.093) 70.634,127.442 70.783,127.293 77.909,127.293 v1(78.059,127.143) ; v1(81.7,136.175) 81.7,138.826 81.849,138.975 87.25,138.975 v1(87.25,142.1) ; v1(87.134,136.143) 87.134,127.492 87.283,127.343 94.409,127.343 v1(94.559,127.193) ; v1(109.45,135.7) 109.387,135.637 103.587,135.637 103.484,135.534 103.484,127.367 103.633,127.218 110.759,127.218 v1(110.909,127.068) ; v1(115.575,135.7) 115.7,135.825 115.7,139.401 115.849,139.55 119.401,139.55 119.55,139.699 v1(119.55,142.075) 119.575,142.1 125.25,142.1 125.5,141.85 v1(125.5,139.25) ; v1(125.5,136.125) 125.418,136.043 v1(119.684,136.043) 119.684,127.392 119.833,127.243 126.959,127.243 v1(127.109,127.093) ; v1(132.5,142.15) 132.5,139.349 132.899,138.95 135.875,138.95 v1(136,138.825) ; v1(136.034,136.043) 136.034,127.392 136.183,127.243 143.309,127.243 v1(143.459,127.093) ; v1@157.75,136 v1(157.707,136.043) v1(152.234,136.043) 152.234,127.392 152.383,127.243 159.509,127.243 v1(159.659,127.093) ; v1(162.725,137.55) 162.7,137.575 162.7,142.175 v1(162.675,142.2) 168.426,142.2 168.575,142.051 v1(168.575,139.175) ; v1(168.525,136.15) 168.525,127.476 168.758,127.243 175.884,127.243 v1(176.034,127.093)
RE0: J1.1 U1.3 | length 12.7
  Top Layer w0.254: U1.3 53.499,130.99 53.35,131.139 53.35,138.375 54.15,139.175 55.076,139.175 55.225,139.324 J1.1
RE1: J1.3 U1.8 | length 16.7
  Top Layer w0.254: J1.3 59.225,135.225 58.4,134.4 58.4,126.575 59.065,125.91 U1.8
RE2: J1.5 U3.3 | length 16.8
  Top Layer w0.254: J1.5 63.225,136.425 63.975,135.675 69.059,135.675 69.059,131.207 69.208,131.058 U3.3@70.884,131.058
RE3: J1.7 U3.8 | length 24.1
  Top Layer w0.254: J1.7 67.225,138.65 67.65,138.225 74.91,138.225 75.059,138.076 75.059,135.293 74.234,134.468 74.234,126.643 74.899,125.978 U3.8@76.134,125.978
RE4: J1.9 U5.3 | length 25.5
  Top Layer w0.254: J1.9 71.225,139.3 71.475,139.05 85.051,139.05 85.2,138.901 85.2,131.257 85.349,131.108 U5.3@87.384,131.108
RE5: J2.1 U5.8 | length 21.9
  Top Layer w0.254: U5.8@92.634,126.028 91.399,126.028 90.734,126.693 90.734,139.934 91.55,140.75 J2.1
RE6: J2.3 U8.3 | length 11.9
  Top Layer w0.254: J2.3 100.925,138.843 101.909,137.859 101.909,131.132 102.058,130.983 U8.3@103.734,130.983
RE7: J2.5 U8.8 | length 17.3
  Top Layer w0.254: J2.5 104.925,139.275 107.084,137.116 107.084,126.568 107.749,125.903 U8.8@108.984,125.903
RE8: J2.7 U10.3 | length 19.2
  Top Layer w0.254: J2.7 108.925,139.21 111.235,136.9 117.526,136.9 117.675,136.751 117.675,131.157 117.824,131.008 U10.3@119.934,131.008
RE9: J2.9 U10.8 | length 26.5
  Top Layer w0.254: J2.9 112.925,138.874 113.074,138.725 123.135,138.725 123.284,138.576 123.284,126.593 123.949,125.928 U10.8@125.184,125.928
RE10: J4.1 U12.3 | length 16.1
  Top Layer w0.254: U12.3@136.284,131.008 134.324,131.008 134.175,131.157 134.175,140.525 134.4,140.75 J4.1
RE11: J4.3 U12.8 | length 17.6
  Top Layer w0.254: U12.8@141.534,125.928 140.299,125.928 139.634,126.593 139.634,134.418 140.459,135.243 140.459,138.584 J4.3
RE12: J4.5 U14.3 | length 15.3
  Top Layer w0.254: J4.5 146.625,136.865 146.774,136.716 150.151,136.716 150.3,136.567 150.3,131.157 150.449,131.008 U14.3@152.484,131.008
RE13: J4.7 U14.8 | length 21.2
  Top Layer w0.254: J4.7 150.625,138.499 150.774,138.35 155.401,138.35 155.55,138.201 155.55,126.877 156.499,125.928 U14.8@157.734,125.928
RE14: J4.9 U16.3 | length 22.7
  Top Layer w0.254: J4.9 154.725,140.65 154.725,139.425 154.967,139.183 164.817,139.183 166.575,137.425 166.575,131.157 166.724,131.008 U16.3@168.859,131.008
RE15: J3.7 U16.8 | length 36
  Top Layer w0.254: U16.8@174.109,125.928 172.874,125.928 172.209,126.593 172.209,138.251 172.358,138.4 191.65,138.4 192.325,139.075 J3.7
WE: J3.6 U1.5 U1.13 U3.5 U3.13 U5.5 U5.13 U8.5 U8.13 U10.5 U10.13 U12.5 U12.13 U14.5 U14.13 U16.5 U16.13 | length 320.7
  Top Layer w0.254: v1(51.825,126.175) 51.825,128.239 51.974,128.387 54.987,128.387 U1.5 ; U1.13 60.342,132.217 62.208,132.217 v1(62.25,132.175) 64.375,132.175 65.275,131.275 65.275,128.974 65.799,128.45 U3.5 ; v1(69.084,128.468) v1@69.109,128.493 ; U3.13@76.134,132.328 76.177,132.286 78.042,132.286 v1(78.084,132.243) 80.209,132.243 81.109,131.343 81.109,129.042 81.633,128.518 85.143,128.518 v1(85.2,128.575) 85.263,128.512 86.805,128.512 U5.5@86.81,128.518 ; U5.13@92.634,132.378 92.677,132.336 94.542,132.336 v1(94.584,132.293) 96.709,132.293 97.609,131.393 97.609,129.092 98.376,128.325 101.6,128.325 v1(101.662,128.387) 103.13,128.387 U8.5@103.31,128.568 ; U8.13@108.984,132.253 109.027,132.211 110.892,132.211 v1(110.934,132.168) 113.059,132.168 113.959,131.268 113.959,128.967 114.726,128.2 v1(117.6,128.2) 117.725,128.325 119.542,128.325 U10.5@119.66,128.443 ; U10.13@125.184,132.278 125.227,132.236 127.092,132.236 v1(127.134,132.193) 129.259,132.193 130.159,131.293 130.159,128.992 130.826,128.325 v1(134.075,128.325) 134.137,128.387 135.78,128.387 U12.5@135.86,128.468 ; U12.13@141.534,132.278 141.577,132.236 143.442,132.236 v1(143.484,132.193) 145.609,132.193 146.509,131.293 146.509,128.992 147.033,128.468 150.093,128.468 v1(150.175,128.55) 150.225,128.5 152.179,128.5 U14.5@152.21,128.468 ; U14.13@157.734,132.278 157.777,132.236 159.642,132.236 v1(159.684,132.193) 161.809,132.193 162.709,131.293 162.709,128.992 163.233,128.468 166.393,128.468 v1(166.475,128.55) 166.525,128.5 168.379,128.5 U16.5@168.41,128.468 ; U16.13@174.109,132.278 174.152,132.236 176.017,132.236 v1(176.059,132.193)
  Bottom Layer w0.254: v1(51.825,126.175) 50.674,126.175 50.525,126.324 50.525,138.026 50.674,138.175 62.101,138.175 62.25,138.026 v1(62.25,132.175) ; v1(69.084,128.468) 69.084,137.276 69.233,137.425 77.935,137.425 78.084,137.276 v1(78.084,132.243) ; v1(85.2,128.575) 85.2,136.942 85.733,137.475 94.435,137.475 94.584,137.326 v1(94.584,132.293) ; v1(101.662,128.387) 101.6,128.45 101.6,136.867 102.083,137.35 110.785,137.35 110.934,137.201 v1(110.934,132.168) ; v1(117.6,128.2) 117.6,137.617 117.749,137.766 126.985,137.766 127.134,137.617 v1(127.134,132.193) ; v1(134.075,128.325) 134.075,136.817 134.633,137.375 143.335,137.375 143.484,137.226 v1(143.484,132.193) ; v1(150.175,128.55) 150.175,136.717 150.833,137.375 159.535,137.375 159.684,137.226 v1(159.684,132.193) ; v1(166.475,128.55) 166.475,136.642 167.208,137.375 172.225,137.375 ; v1(176.059,132.193) 176.059,137.226 175.91,137.375 173.625,137.375 173.575,137.325 173.525,137.375 172.225,137.375 ; J3.6 190.157,140.918 190.157,142.026 190.009,142.175 173.2,142.175 172.225,141.2 172.225,137.375
WE0: J1.2 U1.6 | length 15.2
  Top Layer w0.254: U1.6 56.255,127.18 57.225,128.15 J1.2
WE1: J1.4 U1.11 | length 16.6
  Top Layer w0.254: U1.11 60.415,129.835 63.61,129.835 v1(63.725,129.95)
  Bottom Layer w0.254: J1.4 61.225,139.049 61.374,138.9 63.576,138.9 63.725,138.751 v1(63.725,129.95)
WE2: J1.6 U3.6 | length 22.6
  Top Layer w0.254: J1.6 65.225,137.825 65.625,137.425 72.91,137.425 73.059,137.276 73.059,128.218 72.089,127.248 U3.6@70.884,127.248
WE3: J1.8 U3.11 | length 23.8
  Top Layer w0.254: U3.11@76.134,129.788 79.054,129.788 v1(79.284,130.018)
  Bottom Layer w0.254: J1.8 69.225,138.6 69.55,138.275 79.16,138.275 79.309,138.126 79.309,130.043 v1(79.284,130.018)
WE4: J1.10 U5.6 | length 31
  Top Layer w0.254: J1.10 88.835,140.75 89.559,140.026 89.559,128.268 88.589,127.298 U5.6@87.384,127.298
WE5: J2.2 U5.11 | length 16.9
  Top Layer w0.254: U5.11@92.634,129.838 95.554,129.838 v1(95.784,130.068)
  Bottom Layer w0.254: v1(95.784,130.068) 95.809,130.093 95.809,138.601 95.958,138.75 98.776,138.75 98.925,138.899 J2.2
WE6: J2.4 U8.6 | length 16.6
  Top Layer w0.254: J2.4 102.925,139.275 103.282,138.918 106.075,136.125 106.075,128.309 104.939,127.173 U8.6@103.734,127.173
WE7: J2.6 U8.11 | length 19
  Top Layer w0.254: U8.11@108.984,129.713 111.904,129.713 v1(112.134,129.943)
  Bottom Layer w0.254: J2.6 106.925,138.925 107.35,138.5 112.01,138.5 112.159,138.351 112.159,129.968 v1(112.134,129.943)
WE8: J2.8 U10.6 | length 25.4
  Top Layer w0.254: J2.8 110.925,139.25 112.35,137.825 121.96,137.825 122.109,137.676 122.109,128.168 121.139,127.198 U10.6@119.934,127.198
WE9: J2.10 U10.11 | length 27.5
  Top Layer w0.254: J2.10 114.95,140.775 128.275,140.775 v1(128.3,140.8) ; U10.11@125.184,129.738 128.104,129.738 v1(128.334,129.968)
  Bottom Layer w0.254: v1(128.3,140.8) 128.317,140.783 128.317,129.985 v1(128.334,129.968)
WE10: J4.2 U12.6 | length 16.1
  Top Layer w0.254: U12.6@136.284,127.198 137.489,127.198 138.525,128.234 138.525,138.65 J4.2
WE11: J4.4 U12.11 | length 14.1
  Top Layer w0.254: U12.11@141.534,129.738 144.454,129.738 v1(144.684,129.968)
  Bottom Layer w0.254: J4.4 144.709,140.666 144.709,129.993 v1(144.684,129.968)
WE12: J4.6 U14.6 | length 21
  Top Layer w0.254: J4.6 148.625,137.599 148.774,137.45 154.51,137.45 154.659,137.301 154.659,128.168 153.689,127.198 U14.6@152.484,127.198
WE13: J4.8 U14.11 | length 21.9
  Top Layer w0.254: U14.11@157.734,129.738 160.654,129.738 v1(160.884,129.968)
  Bottom Layer w0.254: J4.8 152.8,140.575 152.8,138.875 153.15,138.525 160.76,138.525 160.909,138.376 160.909,129.993 v1(160.884,129.968)
WE14: J4.10 U16.6 | length 29.3
  Top Layer w0.254: J4.10 170.55,140.75 171.034,140.266 171.034,128.168 170.064,127.198 U16.6@168.859,127.198
WE15: J3.8 U16.11 | length 30.2
  Top Layer w0.254: U16.11@174.109,129.738 177.029,129.738 v1(177.259,129.968) ; v1(177.65,136.05) 178.675,137.075 194.176,137.075 194.325,137.224 J3.8
  Bottom Layer w0.254: v1(177.259,129.968) 177.259,130.234 177.65,130.625 v1(177.65,136.05)
pads on no net: U2.3 U2.11 U4.3 U4.11 U6.3 U6.11 U7.3 U7.5 U7.7 U7.9 U7.11 U7.13 U7.15 U7.17 U9.3 U9.11 U11.3 U11.11 U13.3 U13.11 U15.3 U15.11 U17.3 U17.11

## Polygon pours and split planes (outlines as drawn)
GND on Top Layer "NONET_L01_P-001" (solid, pour order 0): 47.143,143.225 46.725,142.807 46.725,98.525 205.575,98.525 205.309,98.791 205.309,143.225 46.725,143.225
GND on Bottom Layer "NONET_L01_P-001" (solid, pour order 1): 46.725,143.225 46.725,98.746 205.284,98.746 205.575,99.036 205.115,99.497 205.115,143.225 46.949,143.225

## Silkscreen, mask and mechanical layers (free items; w line width, h text height)
Top Overlay:
  the board outline again, w0.254
  text "A0" at 181.146,135.279 h1.52 r90
  text "A1" at 183.271,135.279 h1.52 r90
  text "A2" at 185.421,135.279 h1.52 r90
  text "A3" at 187.371,135.279 h1.52 r90
  text "RE" at 189.371,135.279 h1.52 r90
  text "WE" at 191.546,135.179 h1.52 r90
  text "RE0" at 56.121,135.154 h1.52 r90
  text "WE0" at 58.246,135.154 h1.52 r90
  text "RE1" at 60.396,135.154 h1.52 r90
  text "WE1" at 62.346,135.154 h1.52 r90
  text "RE2" at 64.346,135.154 h1.52 r90
  text "WE2" at 66.446,135.154 h1.52 r90
  text "RE3" at 68.371,135.154 h1.52 r90
  text "WE3" at 70.171,135.154 h1.52 r90
  text "RE4" at 72.246,135.154 h1.52 r90
  text "WE4" at 74.171,135.154 h1.52 r90
  text "RE15" at 193.646,135.129 h1.52 r90
  text "GND" at 199.521,135.079 h1.52 r90
  text "+5v" at 197.621,134.979 h1.52 r90
  text "RE5" at 97.546,134.929 h1.52 r90
  text "WE5" at 99.671,134.929 h1.52 r90
  text "RE6" at 101.821,134.929 h1.52 r90
  text "WE2" at 103.771,134.929 h1.52 r90
  text "RE7" at 105.771,134.929 h1.52 r90
  text "WE7" at 107.871,134.929 h1.52 r90
  text "RE8" at 109.796,134.929 h1.52 r90
  text "WE8" at 111.596,134.929 h1.52 r90
  text "RE9" at 113.671,134.929 h1.52 r90
  text "WE9" at 115.596,134.929 h1.52 r90
  text "WE15" at 195.546,134.929 h1.52 r90
  text "RE10" at 139.596,134.104 h1.52 r90
  text "WE10" at 141.721,134.104 h1.52 r90
  text "RE11" at 143.871,134.104 h1.52 r90
  text "WE11" at 145.821,134.104 h1.52 r90
  text "RE12" at 147.821,134.104 h1.52 r90
  text "WE12" at 149.921,134.104 h1.52 r90
  text "RE13" at 151.846,134.104 h1.52 r90
  text "WE13" at 153.646,134.104 h1.52 r90
  text "RE14" at 155.721,134.104 h1.52 r90
  text "WE14" at 157.646,134.104 h1.52 r90